# EAGLE board 558 multiple osc (EAGLE 7.6.0)
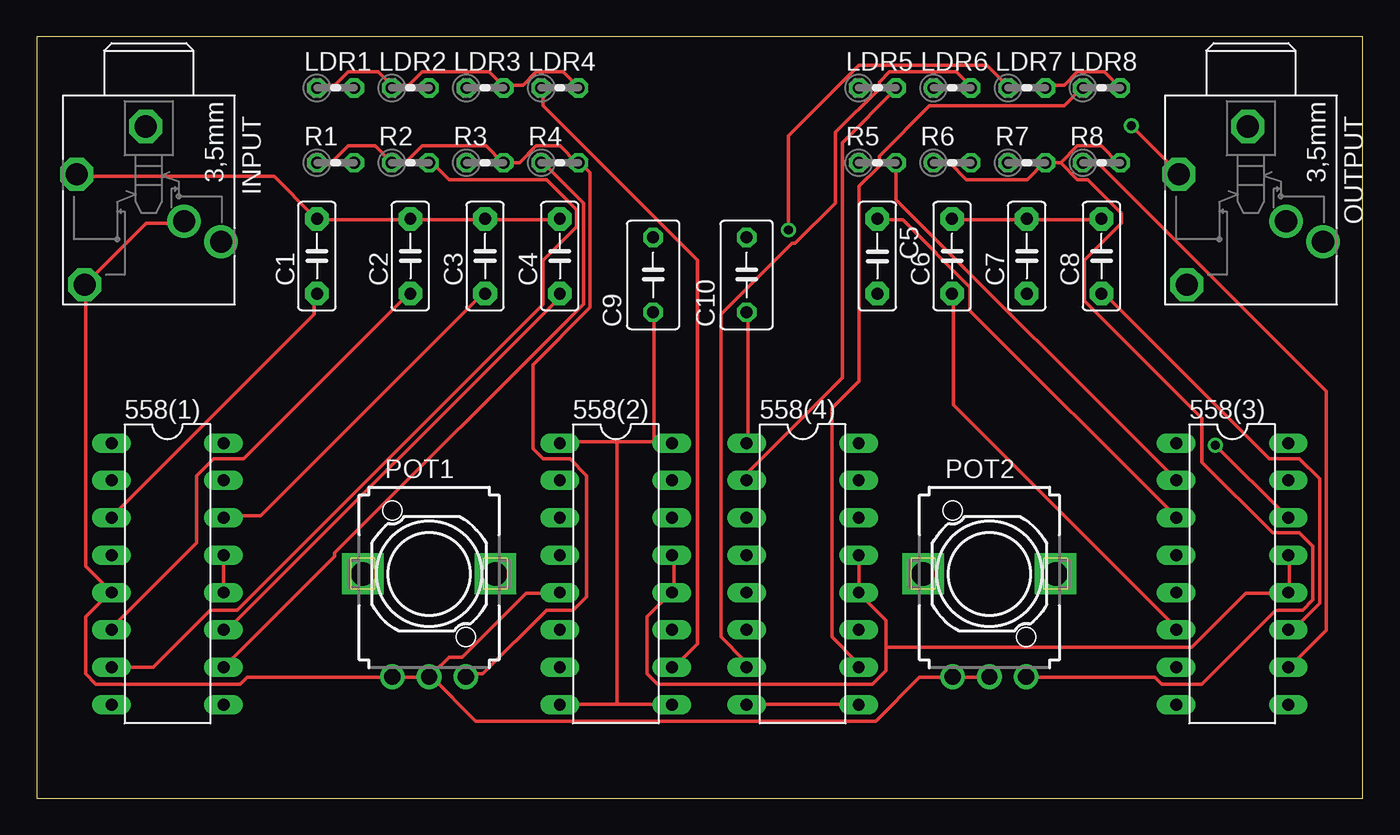
[diagram p0: board, top side]
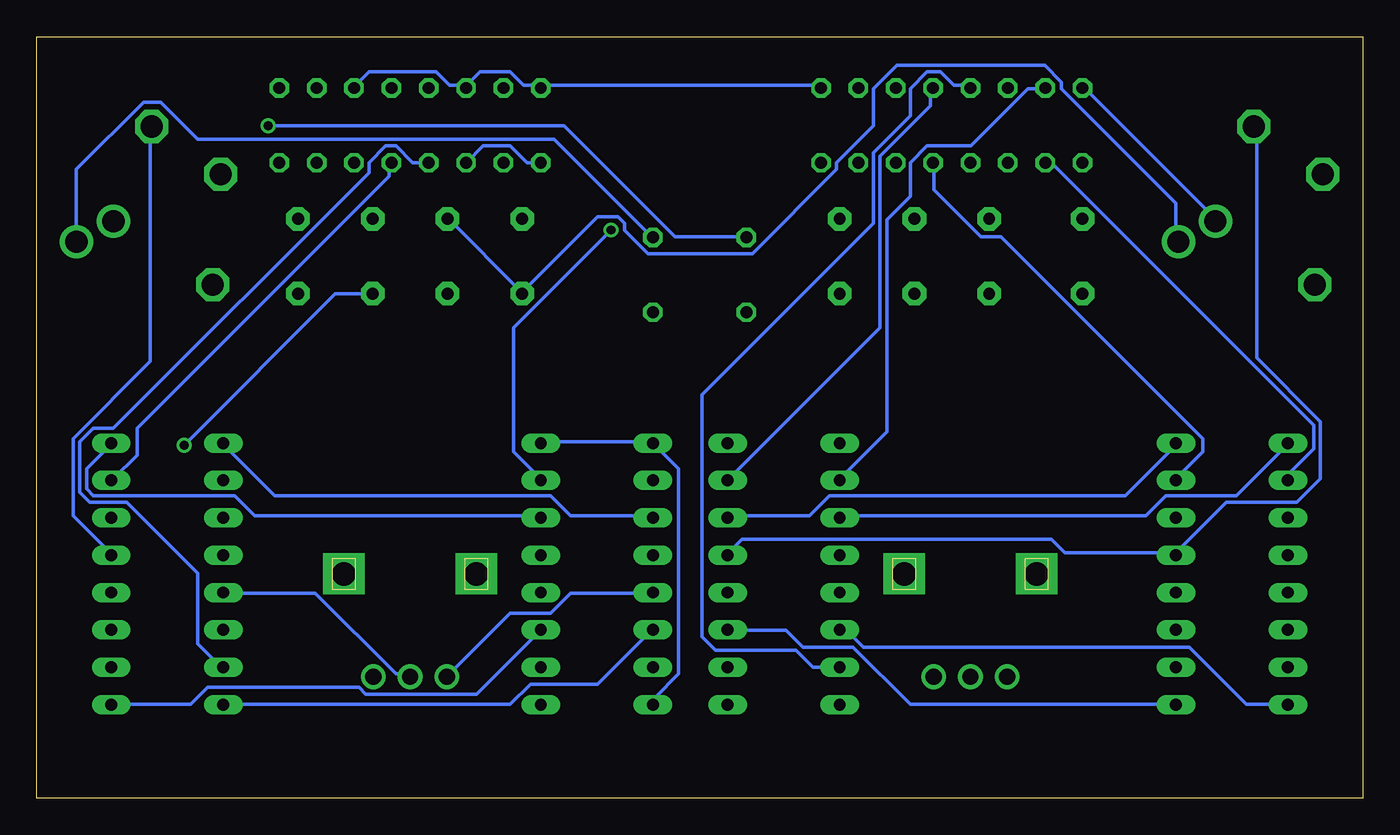
[diagram p1: board, bottom side, seen from below]

Size 90.15 x 51.74 mm. Coordinates in mm from the lower left corner, seen from the top.
Outline: 0,0 90.15,0 90.15,51.74 0,51.74 0,0
Copper layers (1*16): Top 0.035mm / dielectric 1.5mm / Bottom 0.035mm
Design rules "default": minimum track width 10mil, minimum drill 24mil, track to track 8mil, track to pad 8mil, pad to pad 8mil, via to via 8mil, smd to smd 8mil, copper to edge 40mil, drill to drill 8mil, minimum pad ring 10mil, minimum via ring 8mil, stop-mask expansion 4mil, vias tented up to drill 0mil, thermal gap 10mil

## Footprints (pad centres in the part's own frame; a part is rotated, then mirrored left to right if it is on the bottom)
DIL16 = drill 0.813 long: 1 -8.89,-3.81; 2 -6.35,-3.81; 3 -3.81,-3.81; 4 -1.27,-3.81; 5 1.27,-3.81; 6 3.81,-3.81; 7 6.35,-3.81; 8 8.89,-3.81; 9 8.89,3.81; 10 6.35,3.81; 11 3.81,3.81; 12 1.27,3.81; 13 -1.27,3.81; 14 -3.81,3.81; 15 -6.35,3.81; 16 -8.89,3.81
C5B2.5 = drill 0.813 pad 1.6 octagon: 1 -2.54,0; 2 2.54,0
C050-035X075 = drill 0.813 octagon: 1 -2.54,0; 2 2.54,0
PG203J = drill 1.499 octagon: 1 -5.004,-0.203; 4 5.74,-4.369; 5 -1.753,-4.902 | drill 1.499: 2 2.845,4.902; 3 1.448,2.388
0204V = drill 0.813 octagon: 1 -1.27,0; 2 1.27,0
EVUFXM = drill 1.1 pad 1.676: 1 -2.5,-7; 2 0,-7; 3 2.5,-7 | drill 1.6 pad 2.8 square: M1 4.5,0; M2 -4.5,0

## Placement (x,y rotation side)
558(1)  [DIL16]  8.89,15.24 270 top
558(2)  [DIL16]  39.37,15.24 270 top
558(3)  [DIL16]  81.28,15.24 270 top
558(4)  [DIL16]  52.07,15.24 270 top
C1  [C5B2.5]  19.05,36.83 90 top
C2  [C5B2.5]  25.4,36.83 90 top
C3  [C5B2.5]  30.48,36.83 90 top
C4  [C5B2.5]  35.56,36.83 90 top
C5  [C5B2.5]  57.15,36.83 270 top
C6  [C5B2.5]  62.23,36.83 90 top
C7  [C5B2.5]  67.31,36.83 90 top
C8  [C5B2.5]  72.39,36.83 90 top
C9  [C050-035X075]  41.91,35.56 90 top
C10  [C050-035X075]  48.26,35.56 90 top
INPUT  PG203J  [PG203J]  7.62,40.64 270 top
LDR1  [0204V]  20.32,48.26 0 top
LDR2  [0204V]  25.4,48.26 0 top
LDR3  [0204V]  30.48,48.26 0 top
LDR4  [0204V]  35.56,48.26 0 top
LDR5  [0204V]  57.15,48.26 0 top
LDR6  [0204V]  62.23,48.26 0 top
LDR7  [0204V]  67.31,48.26 0 top
LDR8  [0204V]  72.39,48.26 0 top
OUTPUT  PG203J  [PG203J]  82.55,40.64 270 top
POT1  1M  [EVUFXM]  26.67,15.24 0 top
POT2  1M  [EVUFXM]  64.77,15.24 0 top
R1  [0204V]  20.32,43.18 0 top
R2  [0204V]  25.4,43.18 0 top
R3  [0204V]  30.48,43.18 0 top
R4  [0204V]  35.56,43.18 0 top
R5  [0204V]  57.15,43.18 0 top
R6  [0204V]  62.23,43.18 0 top
R7  [0204V]  67.31,43.18 0 top
R8  [0204V]  72.39,43.18 0 top

## Library data of the parts
558(1) 558(2) 558(3) 558(4) = ic-package
C1-C8 = capacitor-wima
C9 C10 = rcl
INPUT OUTPUT = con-hirschmann; OC_FARNELL: unknown; OC_NEWARK: unknown
LDR1-LDR8 R1-R8 = resistor
POT1 POT2 = pot

## Nets
GND: 558(1).12 558(1).13 558(2).12 558(2).13 558(3).12 558(3).13 558(4).12 558(4).13 INPUT.1 OUTPUT.1
INN1: POT1.3 R1.1 R2.1 R3.2 R4.2
INN2: POT2.3 R5.1 R6.1 R7.2 R8.2
INPUT(L): C1.2 C2.2 C3.2 C4.2 INPUT.5
INPUT(R): C5.2 C6.2 C7.2 C8.2 INPUT.2
N$1: 558(2).2 LDR1.2
N$2: 558(2).15 LDR3.1
N$3: 558(2).7 LDR2.2
N$4: 558(2).10 LDR4.1
N$5: 558(4).2 LDR5.2
N$6: 558(4).15 LDR7.1
N$7: 558(4).7 LDR6.2
N$8: 558(4).10 LDR8.1
N$9: C9.2 OUTPUT.5
N$10: C10.2 OUTPUT.2
OUT1: 558(1).1 558(2).3
OUT2: 558(3).1 558(4).3
OUT3: 558(3).16 558(4).14
OUT4: 558(1).16 558(2).14
OUT(L): 558(2).1 558(2).8 558(2).9 558(2).16 C9.1
OUT(R): 558(4).1 558(4).8 558(4).9 558(4).16 C10.1
TIM1: 558(1).2 R1.2
TIM2: 558(1).7 R2.2
TIM3: 558(1).10 R4.1
TIM4: 558(1).15 R3.1
TIM5: 558(3).2 R5.2
TIM6: 558(3).7 R6.2
TIM7: 558(3).15 R7.1
TIM8: 558(3).10 R8.1
TR1: 558(1).3 C1.1
TR2: 558(1).6 C2.1
TR3: 558(1).11 C4.1
TR4: 558(1).14 C3.1
TR5: 558(3).3 C5.1
TR6: 558(1).8 558(2).6
TR7: 558(3).6 C6.1
TR8: 558(1).9 558(2).11
TR9: 558(3).14 C7.1
TR10: 558(3).11 C8.1
TR11: 558(3).8 558(4).6
TR12: 558(3).9 558(4).11
VCC: 558(1).5 558(2).5 558(3).5 558(4).5 INPUT.3 INPUT.4 LDR1.1 LDR2.1 LDR3.2 LDR4.2 LDR5.1 LDR6.1 LDR7.2 LDR8.2 POT1.1 POT1.2 POT2.1 POT2.2

## Tracks (layer width: path | path; a pad name or v marks a point on that pad's centre or on a via)
GND
  Top 0.254: 558(3).13 85.17,16.43 85.17,14.15 558(3).12 84.94,13.92 82.19,13.92 78.54,10.26 57.73,10.26 | 558(4).13 55.91,16.43 55.91,14.15 558(4).12 55.91,13.92 57.73,12.09 57.73,10.26 | 558(1).13 558(1).12 | 558(2).13 43.33,16.43 43.33,14.15 558(2).12 43.1,13.92 41.5,12.32 41.5,8.43 42.19,7.75 56.82,7.75 57.73,8.66 57.73,10.26
  Bottom 0.254: 12.7,16.66 20.24,16.66 21.16,17.58 42.19,17.58 43.1,16.66 558(2).13 | 12.7,16.66 9.27,20.09 4.47,20.09 2.87,21.69 2.87,25.58 7.21,29.92 7.21,45.47 INPUT.1 | 12.7,16.66 558(1).13 | OUTPUT.1 82.42,45.47 82.42,29.69 87.68,24.43 87.68,19.18 85.17,16.66 558(3).13
INN1
  Top 0.254: R1.1 20.02,43.18 21.16,44.32 22.99,44.32 R2.1 25.04,43.18 26.19,44.32 30.53,44.32 31.67,43.18 R3.2 32.82,43.18 33.96,44.32 35.56,44.32 36.7,43.18 R4.2 36.93,43.18 37.62,42.49 37.62,33.35 33.73,29.46 33.73,23.75 34.42,23.06 36.25,23.06 37.39,21.92 37.39,13.69 36.47,12.78 34.65,12.78 30.3,8.43 29.39,8.43 POT1.3
INN2
  Top 0.254: 69.62,43.18 R7.2 68.48,43.18 67.33,42.04 63.22,42.04 62.08,43.18 R6.1 | 69.62,43.18 70.76,44.32 72.36,44.32 73.51,43.18 R8.2 | 69.62,43.18 70.76,42.04 71.45,42.04 73.74,39.75 73.74,39.07 71.22,36.55 71.22,33.81 79.22,25.81 79.22,22.84 84.02,18.03 85.85,18.03 86.77,17.12 86.77,13.46 86.08,12.78 84.25,12.78 79.22,7.75 76.48,7.75 76.02,8.2 67.33,8.2 POT2.3
  Bottom 0.254: R5.1 56.82,43.18 57.96,44.32 59.79,44.32 60.94,43.18 R6.1
INPUT(L)
  Top 0.254: C4.2 35.56,39.29 30.53,39.29 C3.2 30.3,39.29 25.5,39.29 C2.2 25.27,39.29 19.1,39.29 C1.2 18.87,39.52 16.13,42.27 2.87,42.27 INPUT.5
INPUT(R)
  Top 0.254: C6.2 62.31,39.29 67.11,39.29 C7.2 67.33,39.29 72.36,39.29 C8.2
  Bottom 0.254: C6.2 62.08,39.29 57.28,34.49 C5.2 57.05,34.49 52.02,39.52 50.65,39.52 50.19,39.07 50.19,38.61 48.59,37.01 41.5,37.01 35.79,42.72 35.79,43.18 33.27,45.7 33.27,48.21 31.67,49.81 21.61,49.81 20.47,48.67 20.47,48.21 12.7,40.44 12.7,37.92 INPUT.2
N$1
  Bottom 0.254: LDR1.2 21.61,48.21 22.76,48.21 26.64,44.32 29.62,44.32 30.76,43.18 30.76,40.89 32.36,39.29 32.36,24.89 35.56,21.69 558(2).2
N$2
  Bottom 0.254: LDR3.1 29.39,48.21 29.39,47.07 32.82,43.64 32.82,31.98 43.1,21.69 558(2).15
N$3
  Bottom 0.254: 558(2).7 37.39,8.89 38.53,10.03 44.02,10.03 44.93,10.95 44.93,27.41 33.27,39.07 33.27,43.87 30.76,46.38 30.76,48.21 29.62,49.35 28.7,49.35 27.79,48.44 26.87,48.44 LDR2.2
N$4
  Top 0.254: LDR4.1 34.42,48.21 34.42,47.07 44.93,36.55 44.93,10.49 43.33,8.89 558(2).10
N$5
  Top 0.254: 558(4).2 48.36,21.69 48.36,22.15 54.76,28.55 54.76,44.55 58.42,48.21 LDR5.2
N$6  (via drill 0.61)
  Top 0.254: v51.11,38.61 51.11,45.01 55.91,49.81 64.59,49.81 65.96,48.44 LDR7.1
  Bottom 0.254: v51.11,38.61 57.73,31.98 57.73,23.52 55.91,21.69 558(4).15
N$7
  Top 0.254: 558(4).7 48.13,8.89 48.13,9.35 46.53,10.95 46.53,32.89 51.33,37.69 51.56,37.69 54.3,40.44 54.3,45.24 57.28,48.21 57.28,48.67 57.96,49.35 62.54,49.35 63.45,48.44 LDR6.2
N$8
  Top 0.254: 558(4).10 55.68,8.89 55.68,9.35 54.08,10.95 54.08,26.49 55.91,28.32 55.91,41.58 57.28,42.95 57.28,43.64 60.71,47.07 69.85,47.07 70.99,48.21 LDR8.1
N$9  (via drill 0.61)
  Top 0.254: v74.42,45.7 77.62,42.49 OUTPUT.5
  Bottom 0.254: v74.42,45.7 54.3,45.7 46.76,38.15 41.96,38.15 C9.2
N$10
  Bottom 0.254: OUTPUT.2 87.45,42.72 82.88,47.3 81.74,47.3 79.22,44.78 54.99,44.78 48.36,38.15 C10.2
OUT1
  Bottom 0.254: 558(2).3 35.56,19.18 14.76,19.18 13.39,20.55 8.59,20.55 5.16,23.98 558(1).1
OUT2
  Bottom 0.254: 558(4).3 48.36,19.18 53.85,19.18 55.22,20.55 73.96,20.55 77.39,23.98 558(3).1
OUT3
  Bottom 0.254: 558(4).14 55.91,19.18 75.34,19.18 76.71,20.55 86.31,20.55 86.77,21.01 86.77,22.38 85.17,23.98 558(3).16
OUT4
  Bottom 0.254: 558(2).14 43.1,19.18 37.62,19.18 36.25,20.55 16.13,20.55 12.7,23.98 558(1).16
OUT(L)
  Top 0.254: 39.45,6.38 43.1,6.38 558(2).9 | 39.45,6.38 35.56,6.38 558(2).8 | 41.96,24.21 43.1,24.21 558(2).16 41.96,24.21 | 41.96,24.21 39.45,24.21 | 39.45,24.21 35.56,24.21 558(2).1 | 41.96,24.21 41.96,32.89 C9.1 | 39.45,24.21 39.45,6.38
OUT(R)
  Top 0.254: 558(4).8 48.36,6.38 55.68,6.38 558(4).9 | C10.1 48.36,32.89 48.36,24.21 558(4).1
  Bottom 0.254: 558(4).16 55.68,24.21 48.36,24.21 558(4).1 48.13,23.98 46.53,22.38 46.53,8.43 48.13,6.83 48.13,6.38 558(4).8
TIM1
  Bottom 0.254: R1.2 21.16,43.18 3.33,25.35 3.33,23.75 4.93,22.15 4.93,21.69 558(1).2
TIM2
  Top 0.254: 558(1).7 7.9,8.89 11.79,12.78 13.61,12.78 34.42,33.58 34.42,36.55 36.7,38.84 36.7,39.98 34.65,42.04 28.02,42.04 26.87,43.18 R2.2
TIM3
  Top 0.254: 558(1).10 20.24,16.43 20.24,16.66 37.16,33.58 37.16,40.44 34.42,43.18 R4.1
TIM4
  Bottom 0.254: 558(1).15 12.7,21.69 10.87,23.52 10.87,24.43 24.59,38.15 25.96,38.15 29.16,41.35 29.16,43.18 R3.1
TIM5
  Top 0.254: R5.2 58.42,40.66 77.39,21.69 558(3).2
TIM6
  Bottom 0.254: R6.2 64.59,43.18 65.73,44.32 66.42,44.32 67.56,43.18 67.56,42.49 84.94,25.12 86.31,25.12 87.22,24.21 87.22,20.78 86.54,20.09 84.02,20.09 79.22,15.29 79.22,10.49 77.62,8.89 558(3).7
TIM7
  Bottom 0.254: R7.1 66.19,43.18 66.19,42.27 83.34,25.12 83.34,23.29 84.94,21.69 558(3).15
TIM8
  Top 0.254: R8.1 72.14,43.18 87.68,27.63 87.68,11.41 85.17,8.89 558(3).10
TR1
  Top 0.254: 558(1).3 5.16,19.18 18.87,32.89 18.87,34.27 C1.1
TR2
  Top 0.254: 558(1).6 5.16,11.63 10.87,17.35 10.87,21.92 12.01,23.06 14.07,23.06 25.27,34.27 C2.1
TR3
  Top 0.254: C4.1 35.56,34.04 13.16,11.63 12.7,11.63 558(1).11
TR4
  Top 0.254: 558(1).14 12.7,19.18 15.21,19.18 30.3,34.27 C3.1
TR5
  Top 0.254: 558(3).3 77.39,19.18 63.45,33.12 63.45,34.72 58.88,39.29 57.28,39.29 C5.1
TR6
  Bottom 0.254: 558(1).8 5.16,6.38 7.9,6.38 11.79,10.26 33.96,10.26 35.1,11.41 35.56,11.41 558(2).6
TR7
  Top 0.254: 558(3).6 77.39,11.63 62.31,26.72 62.31,34.27 C6.1
TR8
  Bottom 0.254: 558(1).9 12.7,6.38 30.76,6.38 34.65,10.26 38.08,10.26 39.22,11.41 43.1,11.41 558(2).11
TR9  (via drill 0.61)
  Top 0.254: v80.14,23.98 84.94,19.18 558(3).14
  Bottom 0.254: v80.14,23.98 69.85,34.27 67.33,34.27 C7.1
TR10
  Top 0.254: 558(3).11 85.17,11.63 85.62,11.63 87.22,13.23 87.22,21.69 85.85,23.06 83.8,23.06 72.59,34.27 C8.1
TR11
  Bottom 0.254: 558(3).8 77.39,6.38 57.96,6.38 56.59,7.75 52.02,7.75 48.36,11.41 558(4).6
TR12
  Bottom 0.254: 558(4).11 60.25,7.06 67.79,7.06 68.25,7.52 78.54,7.52 79.68,6.38 84.94,6.38 558(3).9
VCC
  Top 0.254: POT2.2 64.59,8.2 62.31,8.2 POT2.1 62.08,8.2 60.02,8.2 57.05,5.23 29.84,5.23 26.87,8.2 POT1.2 | 558(2).5 35.56,13.92 33.27,13.92 28.93,9.58 28.02,9.58 26.87,8.43 POT1.2 | POT1.2 26.64,8.2 24.36,8.2 POT1.1 24.13,8.2 14.3,8.2 13.84,7.75 4.01,7.75 3.33,8.43 3.33,12.32 4.93,13.92 558(1).5 4.93,14.15 3.33,15.75 3.33,34.72 INPUT.4 3.33,34.95 7.44,39.07 9.96,39.07 INPUT.3 | LDR7.2 68.71,48.44 69.85,48.44 70.76,49.35 72.59,49.35 73.51,48.44 LDR8.2 | 24.13,48.44 23.22,49.35 21.16,49.35 20.24,48.44 19.1,48.44 LDR1.1 | LDR4.2 36.7,48.44 35.79,49.35 33.96,49.35 33.05,48.44 31.9,48.44 LDR3.2 31.67,48.44 30.76,49.35 26.19,49.35 25.27,48.44 24.13,48.44 | 24.13,48.44 LDR2.1
  Bottom 0.254: 558(3).5 77.39,13.92 71.22,13.92 65.73,8.43 64.82,8.43 POT2.2 | 558(4).5 48.36,13.92 53.85,13.92 55.22,12.55 57.96,12.55 62.08,8.43 POT2.1 | LDR7.2 68.48,48.44 67.56,49.35 62.99,49.35 62.08,48.44 61.16,48.44 LDR6.1 60.94,48.44 60.02,49.35 57.96,49.35 57.05,48.44 55.91,48.44 LDR5.1 55.68,48.44 36.93,48.44 LDR4.2 | LDR1.1 18.87,48.21 9.96,39.29 INPUT.3